# Altium PCB DragonFly.PcbDoc (part 2 of 2)
Units mil, origin at the board's own origin, x right, y up, seen from the top; angles counter-clockwise.
Board outline 2810.81 x 2810.8 mil, 4 copper layers (Top Layer, Mid-Layer 1, Mid-Layer 2, Bottom Layer); 100 components, 58 nets, 317 pads, 146 vias.
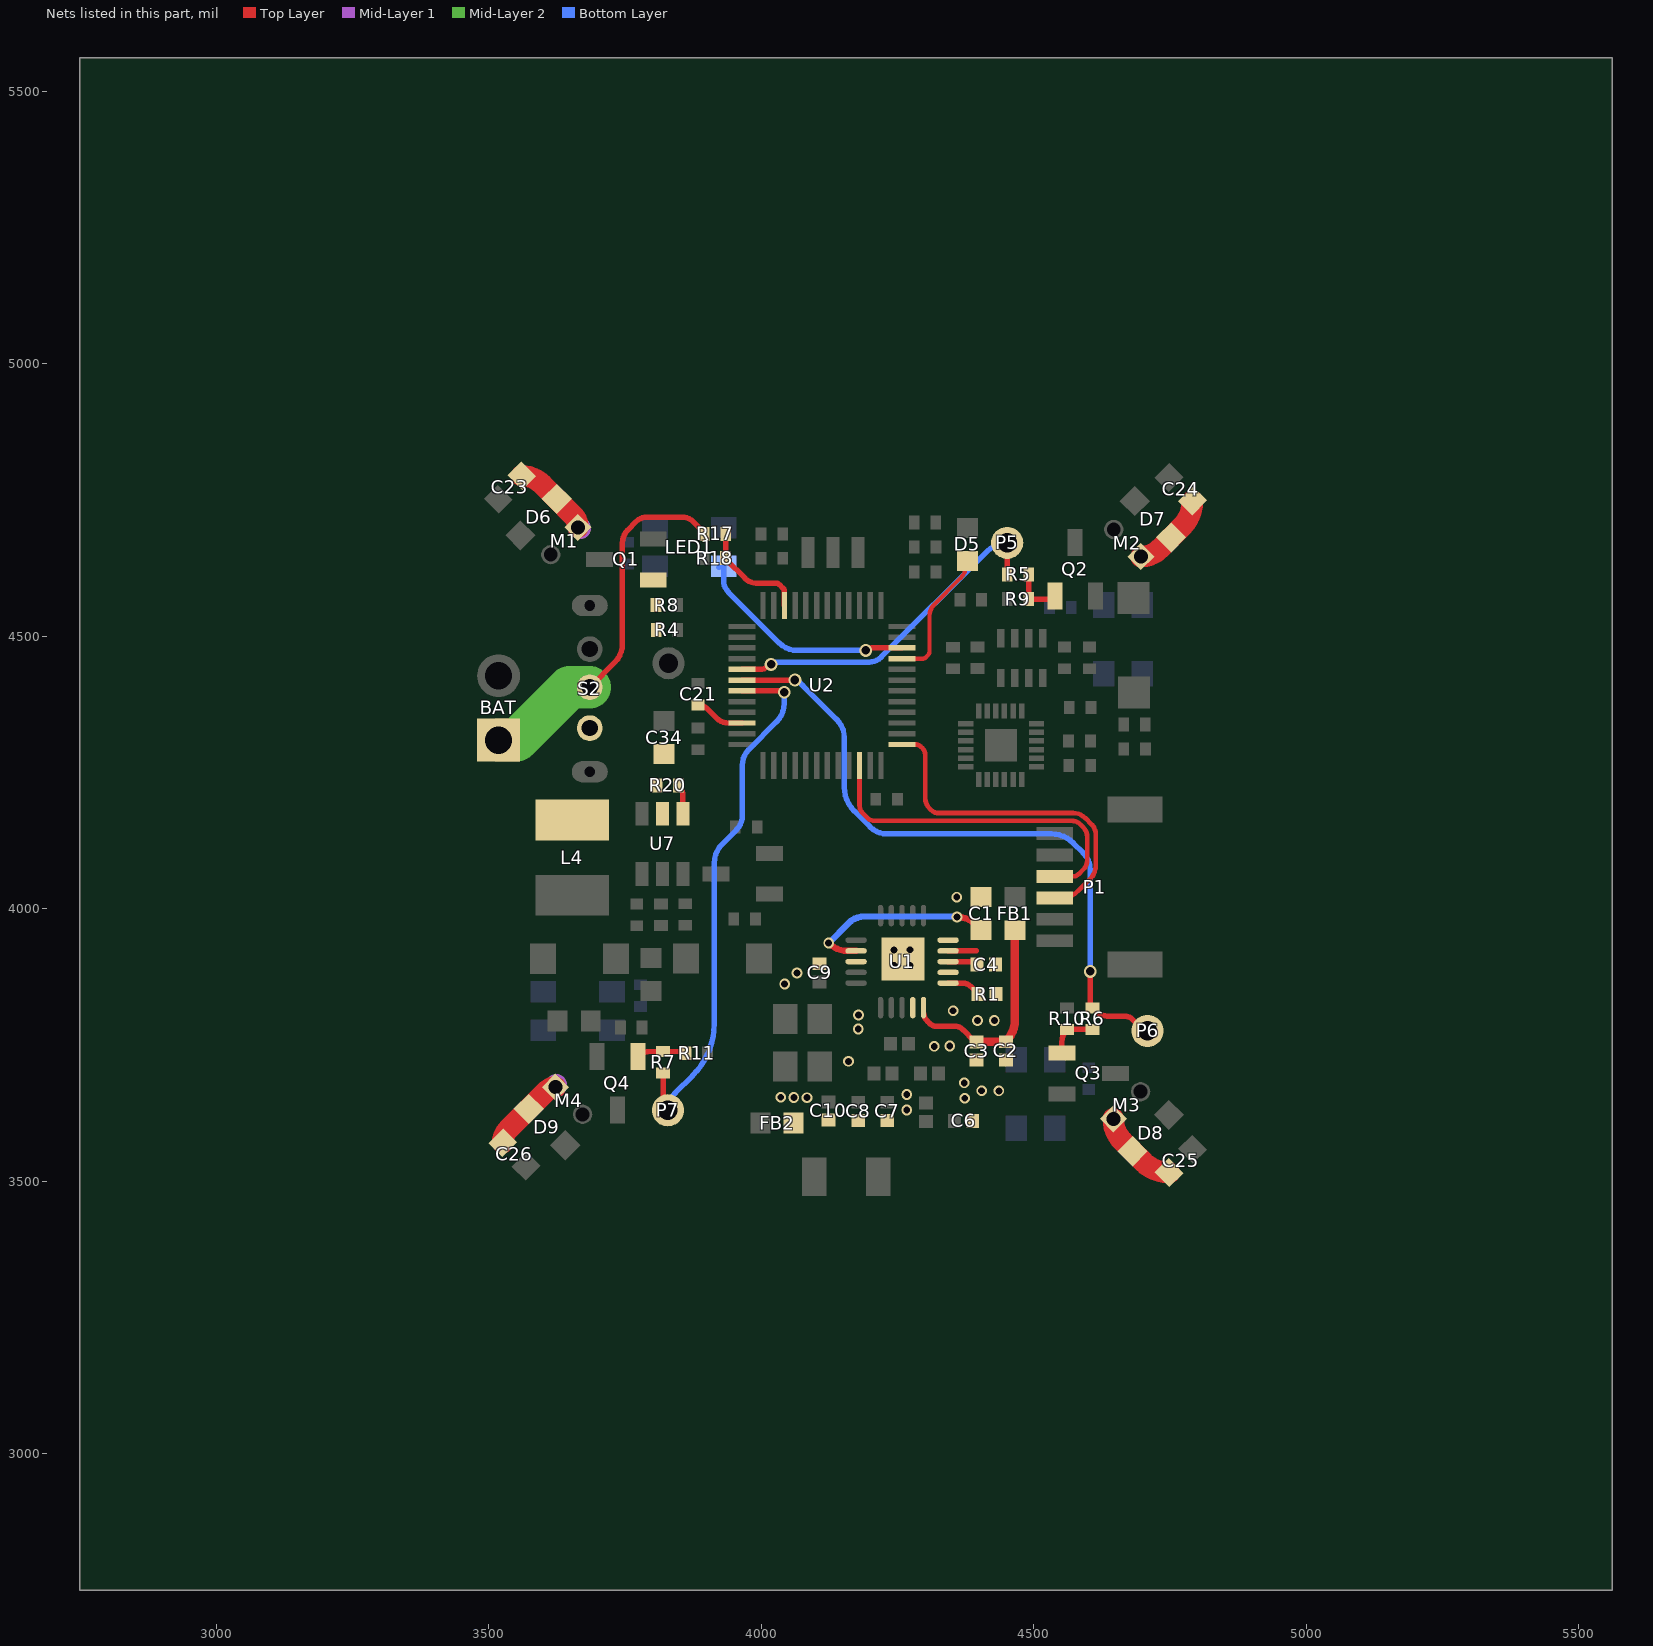
[diagram p4: the nets of this part, all layers, seen from the top]

## Via types
v1: diameter 19.69, hole 12.6, Top Layer to Bottom Layer, 135 vias
v2: diameter 23.62, hole 15.75, Top Layer to Bottom Layer, 11 vias

## Nets (pads, with @x,y where several pads share a name; then routed paths per layer and width w, separated by ;. In a path a pad name is that pad's centre, name@x,y a point inside that pad or via, vN(x,y) a via of type N, cw(c..) or ccw(c..) an arc to the next point about the centre after c; other vN are vias at no path point) (continued)
PWM2: P5.1 R5.1 U2.17 | length 635
  Top Layer w10: U2.17@3964.68,4439.06 3995.68,4439.06 ccw(c3995.71,4470.65) v2(4018.05,4448.31) ; R5.1@4451.08,4614.2 P5.1@4451.08,4671.14 ; R5.1@4451.13,4614.2 ccw(c4452.43,4614.2) R5.1@4451.45,4613.29
  Bottom Layer w10: v2(4018.05,4448.31) cw(c4027.56,4438.81) 4027.56,4452.25 4048.82,4452.25 4187.73,4452.25 4198.16,4452.25 ccw(c4198.16,4483.17) 4220.02,4461.31 4414.81,4656.1 cw(c4451.13,4619.78) P5.1@4451.13,4671.14
PWM3: P6.1 R6.1 U2.18 | length 1236.4
  Top Layer w10: U2.18@3964.73,4419.36 4065.58,4419.38 ccw(c4065.62,4420.04) v2@4066.08,4419.57 ; v2(4603.48,3884.93) 4603.48,3827.52 ccw(c4616.94,3827.52) 4607.42,3818 4614.04,3811.39 ccw(c4634.19,3831.53) 4634.19,3803.04 4665.84,3803.04 cw(c4665.83,3781.53) 4681.04,3796.74 4697.21,3780.58 ccw(c4708.6,3791.97) P6.1@4708.6,3775.88
  Bottom Layer w10: v2(4061.75,4419.57) cw(c4061.75,4409.07) v2@4069.17,4416.5 ; v2@4069.18,4416.5 4075.88,4409.79 4138.38,4347.27 cw(c4104.78,4313.67) 4152.3,4313.67 4152.3,4222.58 ccw(c4212.79,4222.58) 4170.02,4179.81 4200.01,4149.82 ccw(c4230.26,4180.06) 4230.25,4137.29 4532.07,4137.29 cw(c4532.07,4080.83) 4571.99,4120.76 4590.96,4101.79 cw(c4560.71,4071.54) 4603.48,4071.54 v2(4603.48,3884.93)
PWM4: P7.1 R7.1 U2.19 | length 989
  Top Layer w10: R7.1@3819.98,3698.71 3819.98,3651.14 ccw(c3849.61,3651.14) P7.1@3828.68,3630.21 ; U2.19@3964.73,4399.67 4035.88,4399.69 cw(c4035.89,4390.96) v2(4042.06,4397.13)
  Bottom Layer w10: P7.1@3828.68,3630.21 cw(c3873.35,3630.21) 3841.77,3661.8 3874.35,3694.38 ccw(c3779.3,3789.43) 3913.72,3789.43 3913.72,4083.75 cw(c3962.19,4083.75) 3927.92,4118.02 3954.27,4144.38 ccw(c3927.66,4170.99) 3965.29,4170.99 3965.3,4234.93 3965.3,4263.34 cw(c4005.88,4263.34) 3977.18,4292.04 4028.28,4343.19 ccw(c3995.02,4376.46) 4042.07,4376.46 v2(4042.06,4397.13)
Q1_1: Q1.1 R4.2 R8.2
Q2_1: Q2.1 R5.2 R9.2 | length 94.9
  Top Layer w10: R5.2@4490.88,4613.28 4490.88,4568.94 cw(c4489.55,4568.94) 4490.49,4568 4525.18,4568 ccw(c4525.2,4586.85) Q2.1@4538.52,4573.52
Q3_1: Q3.1 R6.2 R10.2 | length 92.2
  Top Layer w10: Q3.1@4551.53,3735.32 4551.48,3755.85 ; 4551.53,3755.85 cw(c4583.76,3755.85) R10.2@4560.97,3778.63 ; R10.2@4560.98,3778.63 R6.2@4607.38,3778.63
Q4_1: Q4.1 R7.2 R11.2 | length 91.8
  Top Layer w10: Q4.1@3773.56,3729.01 cw(c3795.44,3707.14) 3795.44,3738.07 ; 3795.48,3738.07 3819.98,3738.07 R11.2@3854.58,3738.07 ; R11.2@3854.55,3738.07 cw(c3854.55,3727.32) R11.2@3862.15,3734.92
R1_1: R1.1 U1.16 | length 62.8
  Top Layer w10: U1.16@4342.57,3863.55 4369.78,3863.55 ; 4369.83,3863.55 cw(c4369.83,3843.79) 4383.8,3857.76 4396.68,3844.87 cw(c4395.02,3843.2) R1.1@4397.38,3843.2
R20_1: R20.1 U7.4 | length 54.5
  Top Layer w10: R20.1@3848.37,4226.26 cw(c3829.37,4207.26) 3856.24,4207.26 ; U7.4@3856.28,4173.91 3856.28,4207.26
RF-3V3: C1.1 C2.1 C3.1 C4.1 FB1.2 U1.7 U1.15 U1.18 U1.19 | length 860.1
  Top Layer w10: U1.15@4297.57,3818.55 4297.57,3810.55 ccw(c4320.44,3810.55) 4304.27,3794.38 4309.38,3789.27 ccw(c4320.81,3800.69) 4320.81,3784.54 4354.41,3784.54 cw(c4354.42,3763.03) 4369.62,3778.24 4390.38,3757.45 ccw(c4394.89,3761.92) C3.1@4394.88,3755.63 ; U1.18@4342.57,3902.92 4382.78,3902.92 cw(c4382.8,3884.52) C4.1@4395.81,3897.53 ; U1.19@4342.57,3922.6 4394.08,3922.6
  Top Layer w11.81: v1(4123.56,3936.9) ccw(c4158.08,3971.41) 4158.08,3922.6 U1.7@4173.83,3922.6 ; v1(4358.99,3984.93) cw(c4358.99,3937.39) 4392.61,3971.01 C1.1@4403.09,3960.52
  Top Layer w15.75: C3.1@4394.88,3755.63 cw(c4396.05,3754.43) C3.1@4396.05,3756.07 ; C3.1@4396.08,3756.07 C2.1@4448.68,3756.07 ; C2.1@4448.67,3756.07 ccw(c4408.55,3796.2) 4465.29,3796.2 FB1.2@4465.3,3960.51
  Bottom Layer w11.81: v1(4123.56,3936.9) 4160.41,3973.74 cw(c4189.31,3944.84) 4189.31,3985.72 4357.1,3985.72 cw(c4357.1,3983.03) v1(4358.99,3984.93)
RF-GND: C1.2 C2.2 C3.2 C4.2 C6.1 C7.1 C8.1 C9.1 C10.1 FB2.2 pad.9 R1.2 U1.8 U1.14 U1.17 U1.20
  other v1: 4266.87,3630.6 4373.17,3652.25 4083.8,3653.43 4035.76,3654.22 4059.78,3653.83 4266.87,3659.34 4404.27,3666.03 4435.76,3665.93 4372.38,3680.6 4159.78,3719.97 4317.26,3747.53 4345.61,3748.32 4177.89,3779.42 4396.79,3794.77 4427.5,3794.77 4178.28,3805.01 4351.91,3812.88 4042.85,3862.09 4065.69,3882.17 4243.24,3896.34 4272.77,3895.95 4243.24,3924.3 4272.77,3924.69 4358.6,4021.15
RGB: LED1.4 U2.46 | length 414.3
  Top Layer w10: v2(4191.67,4473.9) cw(c4202.6,4462.98) 4202.6,4478.43 U2.46@4258.04,4478.41
  Bottom Layer w10: LED1.4@3922.38,4625.96 cw(c3925.05,4625.96) 3923.16,4627.84 ccw(c3924.1,4626.9) LED1.4@3922.78,4626.9 ; LED1.4@3931.02,4627.85 3930.98,4601.48 ccw(c3959.57,4601.48) 3939.38,4581.3 4033.78,4486.9 ccw(c4065.16,4518.26) 4065.16,4473.9 v2(4191.67,4473.9)
SWCLK: P1.3 U2.37 | length 643.3
  Top Layer w8.66: U2.37@4258.04,4301.25 4283.48,4301.26 ; 4283.44,4301.26 cw(c4283.44,4288.51) 4292.46,4297.53 4295.99,4293.99 cw(c4284.57,4282.57) 4300.73,4282.57 4300.73,4202.6 ccw(c4326.27,4202.6) 4308.21,4184.54 4311.97,4180.77 ccw(c4324.74,4193.54) 4324.74,4175.48 4572.17,4175.48 cw(c4572.17,4144.56) 4594.03,4166.42 4606.64,4153.82 cw(c4590.51,4137.68) 4613.32,4137.68 4613.32,4093.08 4613.32,4078.21 cw(c4581.06,4078.21) 4603.88,4055.4 4580.25,4031.78 cw(c4551.75,4060.28) 4551.75,4019.97 P1.3@4538.52,4019.97
SWDIO: P1.4 U2.34 | length 642.8
  Top Layer w8.66: 4180.26,4188.79 ccw(c4199.07,4188.78) 4185.77,4175.48 4194.65,4166.6 ccw(c4207.42,4179.36) 4207.42,4161.31 4569.21,4161.31 cw(c4569.21,4138.46) 4585.37,4154.61 4590.73,4149.25 cw(c4573.26,4131.78) 4597.97,4131.78 4597.97,4104.24 4597.97,4089.05 cw(c4573.77,4089.05) 4590.88,4071.94 4582.46,4063.51 cw(c4572.38,4073.59) 4572.38,4059.34 P1.4@4538.58,4059.34 ; 4180.28,4188.78 U2.34@4180.28,4262.86 ; P1.4@4538.52,4059.34 P1.4@4540.28,4059.34
U2_22: C21.2 U2.22 | length 91.8
  Top Layer w10: C21.2@3884.17,4373.59 cw(c3884.19,4349.99) 3900.88,4366.67 3917.66,4349.89 ccw(c3939.98,4372.22) 3939.98,4340.64 U2.22@3964.73,4340.62
USER-LED: D5.2 U2.45 | length 249.2
  Top Layer w7.87: U2.45@4257.98,4458.75 4296.88,4458.75 ; 4296.85,4458.75 ccw(c4296.85,4464.78) 4301.12,4460.52 4305.82,4465.21 ccw(c4299.09,4471.94) 4308.6,4471.94 4308.6,4537.24 cw(c4338.18,4537.24) 4317.26,4558.16 4364.7,4605.6 ccw(c4332.43,4637.87) D5.2@4378.07,4637.87
VBAT: BAT.1 R17.1 S2.2 | length 683
  Top Layer w10: S2.2@3685.37,4406.19 3731.58,4452.4 ccw(c3698.65,4485.32) 3745.22,4485.32 3745.22,4671.01 cw(c3778.82,4671.01) 3755.06,4694.77 3770.61,4710.32 cw(c3790.1,4690.83) 3790.1,4718.39 3854.06,4718.39 cw(c3854.06,4687.48) 3875.92,4709.34 3894.18,4691.06 cw(c3890.83,4687.68) R17.1@3895.55,4687.69
  Mid-Layer 2 w78.74: BAT.1@3518.05,4309.18 3551.38,4309.18 3648.38,4406.19 S2.2@3685.37,4406.19
VBAT-OUT: C23.2 C24.2 C25.2 C26.2 C34.1 D6.1 D7.1 D8.1 D9.1 L4.1 M1.1 M2.1 M3.1 M4.1 R20.2 S2.3 U7.5 | length 601.4
  Top Layer w39.37: C26.2@3525.65,3570.61 cw(c3560.34,3570.61) 3535.81,3595.14 D9.1@3573.45,3632.78 M4.1@3607.48,3666.77 ; C23.2@3560.42,4794.14 cw(c3560.39,4741.1) 3597.88,4778.59 D6.1@3624.87,4751.61 3654.38,4722.05 cw(c3631.87,4699.5) M1.1@3663.76,4699.5 ; M4.1@3607.45,3666.78 cw(c3622.21,3652.01) M4.1@3622.22,3672.89 ; M3.1@4645.83,3614.29 ccw(c4703.68,3614.29) 4662.77,3573.39 ; 4662.78,3573.39 D8.1@4681.1,3555.06 4700.58,3535.56 ccw(c4748.19,3583.16) C25.2@4748.19,3515.85 ; M2.1@4696.56,4645.78 ccw(c4696.56,4694.11) 4730.74,4659.94 ; 4730.78,4659.94 D7.1@4751.85,4681.05 4771.38,4700.55 ; 4771.35,4700.55 ccw(c4723.76,4748.14) C24.2@4791.06,4748.14
  Mid-Layer 1 w39.37: M4.1@3622.22,3672.89 ccw(c3618,3677.1) M4.1@3623.96,3677.1 ; M1.1@3663.76,4699.5 cw(c3663.76,4692.97) M1.1@3668.38,4697.59
VBAT-TST: R17.2 R18.1 U2.10 | length 204.4
  Top Layer w10: R17.2@3934.98,4687.69 3934.98,4644.14 cw(c3933.64,4644.14) 3934.59,4643.19 ccw(c3938.38,4643.19) 3935.7,4640.51 3970.78,4605.4 ccw(c3990.77,4625.36) 3990.77,4597.13 4026.75,4597.13 cw(c4026.75,4587.72) 4033.4,4594.38 4040.19,4587.59 cw(c4034.74,4582.13) 4042.45,4582.13 ; U2.10@4042.48,4556.17 4042.48,4582.13
pads on no net: E1.0 LED4.2 P1.7 P1.8 S2.1 S2.4 S2.5 U2.2 U2.3 U2.4 U2.11 U2.12 U2.13 U2.14 U2.15 U2.21 U2.32 U2.33 U2.38 U2.39 U2.41 U7.6 U9.2 U9.3 U9.4 U9.5 U9.6 U9.7 U9.14 U9.15 U9.16 U9.17 U9.19 U9.21 XTAL.2 XTAL.4

## Polygon pours and split planes (outlines as drawn)
RF-GND on Top Layer "Top Layer-RF-GND" (solid, remove dead copper, pour order 0): 4035.77,3575.09 4035.77,3614.85 ccw(c3996.79,3614.85) 4024.35,3642.41 4012.32,3654.43 cw(c4036.52,3678.63) 4002.3,3678.63 4002.3,3838.49 cw(c4018.43,3838.49) 4007.03,3849.89 4147.97,3990.83 cw(c4186.95,3951.85) 4186.95,4006.98 4255.81,4006.98 ccw(c4255.81,4052.68) 4288.13,4020.36 4319.18,4051.41 cw(c4332.62,4037.97) 4332.62,4056.98 4415.07,4056.98 cw(c4415.07,4042.19) 4425.53,4052.64 4449.46,4028.71 cw(c4429.3,4008.55) 4457.81,4008.55 ccw(c4477.77,4008.55) 4463.66,3994.44 4464.11,3993.98 4471.01,3987.09 cw(c4462.94,3979.02) 4474.35,3979.02 4474.35,3696.31 cw(c4425.96,3696.31) 4460.18,3662.09 4421.25,3623.17 ccw(c4462.25,3582.17) 4404.27,3582.17 cw(c4369.33,3581.53) 4403.88,3576.27 cw(c4385.83,3595.82) 4400.33,3573.51 4325.53,3573.12
GND on Top Layer "Top Layer-GND" (solid, remove dead copper, pour order 4): 3408.8,4749.49 ccw(c3408.8,4751.39) 3410.14,4750.05 3551.71,4891.61 cw(c3565.02,4878.31) 3565.02,4897.13 3608.8,4897.13 4736.77,4897.13 cw(c4736.77,4864.86) 4759.59,4887.68 4874.46,4772.81 cw(c4842.87,4741.22) 4887.54,4741.22 4887.54,3579.62 cw(c4840.49,3579.62) 4873.76,3546.35 4764.82,3437.41 cw(c4737.93,3464.29) 4737.94,3426.27 3610.13,3426.27 cw(c3610.13,3498.86) 3558.8,3447.53 3448.91,3557.42 cw(c3485.88,3594.38) 3433.61,3594.39 3433.61,4692.58 ccw(c3418.82,4692.58) 3429.28,4703.03 3419.83,4712.48 cw(c3447.38,4740.05) 3408.41,4740.04
RF-GND on Bottom Layer "Bottom Layer-RF-GND" (solid, remove dead copper, pour order 1): 4034.59,3532.57 4034.59,3613.66 ccw(c3995.61,3613.66) 4023.17,3641.23 4011.15,3653.25 cw(c4035.34,3677.44) 4001.13,3677.45 4001.13,3837.3 cw(c4017.26,3837.3) 4005.85,3848.71 4146.79,3989.64 cw(c4185.77,3950.66) 4185.77,4005.78 4254.63,4005.78 ccw(c4254.64,4051.49) 4286.95,4019.17 4318,4050.22 cw(c4331.44,4036.78) 4331.44,4055.78 4413.9,4055.78 cw(c4413.9,4041) 4424.35,4051.45 4448.28,4027.52 cw(c4428.12,4007.36) 4456.64,4007.36 ccw(c4476.6,4007.36) 4462.48,3993.25 4462.93,3992.8 4469.83,3985.9 cw(c4461.76,3977.83) 4473.17,3977.84 4473.17,3695.12 cw(c4424.78,3695.12) 4459,3660.91 4420.07,3621.98 ccw(c4461.07,3580.99) 4403.09,3580.99 4403.09,3569.48 cw(c4368.15,3569.48) 4392.86,3544.76 4387.66,3539.57 cw(c4368.85,3558.39) 4368.84,3531.78
GND on Bottom Layer "Bottom Layer-GND" (solid, remove dead copper, pour order 6): 3408.6,4749.49 ccw(c3408.61,4751.4) 3409.95,4750.05 3551.52,4891.62 cw(c3564.83,4878.31) 3564.82,4897.13 3608.6,4897.13 4736.58,4897.13 cw(c4736.58,4864.87) 4759.39,4887.68 4874.26,4772.81 cw(c4842.67,4741.22) 4887.34,4741.23 4887.34,3579.61 cw(c4840.3,3579.62) 4873.56,3546.35 4764.62,3437.41 cw(c4737.74,3464.29) 4737.73,3426.28 3609.93,3426.28 cw(c3609.93,3498.86) 3558.6,3447.53 3448.72,3557.42 cw(c3485.68,3594.38) 3433.41,3594.38 3433.41,4692.58 ccw(c3418.62,4692.58) 3429.08,4703.04 3419.62,4712.49 cw(c3447.18,4740.04) 3408.21,4740.05
3V3-1 on Mid-Layer 2 "Mid-Layer 2-3V3-1" (solid, remove dead copper, pour order 2): 3780.65,3771.54 3822.38,3771.54 3828.29,3777.45 3828.29,3869.97 3833.8,3875.48 3872.78,3875.48 3877.89,3875.48 4033.8,4031.39 4303.88,4031.39 4344.82,4072.33 4382.22,4109.73 4536.55,4109.73 4549.15,4122.33 4549.15,4677.84 4541.67,4682.96 3823.56,4684.14 3801.12,4660.91 3801.12,3970.76 3766.87,3936.5 3766.87,3776.27 3771.2,3771.94
VBAT-OUT on Mid-Layer 2 "Mid-Layer 2-VBAT-OUT" (solid, remove dead copper, pour order 3): 3408.8,4749.49 ccw(c3408.8,4751.39) 3410.14,4750.05 3551.71,4891.61 cw(c3565.02,4878.31) 3565.02,4897.13 3608.8,4897.13 4736.77,4897.13 cw(c4736.77,4864.87) 4759.59,4887.68 4874.45,4772.81 cw(c4842.86,4741.22) 4887.54,4741.22 4887.54,3579.62 cw(c4840.49,3579.62) 4873.76,3546.35 4764.82,3437.41 cw(c4737.93,3464.29) 4737.93,3426.27 3610.13,3426.27 cw(c3610.13,3498.86) 3558.8,3447.53 3448.91,3557.42 cw(c3485.88,3594.38) 3433.6,3594.38 3433.6,4692.58 ccw(c3418.82,4692.58) 3429.27,4703.03 3419.82,4712.48 cw(c3447.38,4740.04) 3408.41,4740.04
GND on Mid-Layer 1 "Mid-Layer 1-GND" (solid, remove dead copper, pour order 5): 3408.8,4749.49 ccw(c3408.8,4751.4) 3410.14,4750.05 3551.71,4891.62 cw(c3565.02,4878.31) 3565.02,4897.13 3608.8,4897.13 4736.78,4897.13 cw(c4736.77,4864.87) 4759.59,4887.68 4874.45,4772.81 cw(c4842.86,4741.22) 4887.54,4741.23 4887.54,3579.61 cw(c4840.49,3579.61) 4873.76,3546.35 4764.81,3437.41 cw(c4737.93,3464.29) 4737.93,3426.27 3610.13,3426.27 cw(c3610.13,3498.86) 3558.8,3447.53 3448.91,3557.42 cw(c3485.88,3594.38) 3433.61,3594.38 3433.61,4692.58 ccw(c3418.82,4692.59) 3429.28,4703.04 3419.82,4712.49 cw(c3447.38,4740.04) 3408.41,4740.05

## Keep-outs
Top Layer:
  region: 4426.12,4408.35 4426.12,4386.31 4487.54,4386.31 4487.63,4386.4 4487.78,4386.62 4487.88,4386.86 4487.93,4387.12 4487.93,4387.26 4487.93,4401.66 4487.93,4402.6 4487.57,4404.43 4486.85,4406.16 4485.81,4407.72 4485.15,4408.38 4484.78,4408.75
  region: 4356.64,4349.49 4378.69,4349.49 4378.69,4410.91 4378.59,4411.01 4378.37,4411.15 4378.13,4411.25 4377.87,4411.3 4377.74,4411.3 4363.33,4411.3 4362.39,4411.3 4360.56,4410.94 4358.83,4410.22 4357.27,4409.18 4356.61,4408.52 4356.25,4408.16
Mid-Layer 1:
  region: 3982.81,3553.83 3982.81,3564.06 3990.29,3571.54 3997.78,3571.54 4126.12,3571.54 4293.84,3571.54 4314.7,3550.68 4314.7,3525.48 4314.7,3471.15 4275.73,3432.17 4000.53,3432.17 3982.81,3449.89 3982.81,3549.5
Mid-Layer 2:
  region: 4001.12,3574.69 4310.96,3574.69 4326.71,3558.95 4326.71,3464.85 4296.4,3434.54 4007.03,3434.54 3992.07,3449.5 3992.07,3565.64 4000.73,3574.3
Bottom Layer:
  region: 3893.64,4411.7 3947.58,4411.7 3965.3,4429.42 3965.3,4527.45 3971.59,4533.75 3977.5,4533.75 3981.04,4530.2 3981.04,4413.27 3972.78,4405.01 3893.64,4405.01 3892.46,4406.19 3892.46,4410.91

## Other copper
Top Layer:
  region net Q1_1: 3796.79,4498.31 3817.66,4498.31 3817.66,4570.75 3796.79,4570.75
  region net 3V3-1: 4491.28,4271.15 4504.27,4271.15 4504.27,4297.13 4491.28,4297.13
  region net RF-3V3: 4383.01,3941.62 4485.37,3941.62 4485.37,3979.81 4383.01,3979.81
  region net RF-3V3: 4383.01,3884.53 4408.21,3884.53 4408.21,3979.81 4383.01,3979.81
  region net 5V: 3838.13,3822.33 3885.77,3822.33 3885.77,3936.11 3838.13,3936.11
  region net 3V3-1: 4271.2,4512.88 4284.59,4512.88 4284.59,4533.35 4271.2,4533.35
  region net 3V3-1: 3908.99,4173.12 3955.05,4173.12 3955.05,4239.26 3908.99,4239.26
  region net 3V3-1: 4225.92,4660.12 4290.49,4660.12 4290.49,4686.89 4225.92,4686.89
  region net 3V3-1: 4338.91,4469.96 4409.78,4469.96 4409.78,4490.04 4338.91,4490.04
  region net 3V3-1: 4338.91,4470.36 4380.25,4470.36 4380.25,4521.54 4338.91,4521.54
  region net 3V3-1: 4238.91,4188.87 4284.19,4188.87 4284.19,4213.67 4238.91,4213.67
  region net 3V3-1: 4264.11,4188.86 4284.19,4188.86 4284.19,4249.1 4264.11,4249.1
  region net 3V3-1: 3988.91,4630.99 4009.78,4630.99 4009.78,4700.28 3988.91,4700.28
  region net 3V3-1: 3958.99,4675.47 4009.78,4675.47 4009.78,4700.67 3958.99,4700.67
  region net C7_2: 4194.03,3710.91 4194.03,3687.55 4194.01,3687.02 4193.8,3685.99 4193.4,3685.02 4192.81,3684.14 4192.46,3683.75 4166.25,3657.53 4166.11,3657.41 4165.8,3657.2 4165.45,3657.06 4165.09,3656.99 4164.9,3656.98 4164.9,3632.57 4245.22,3632.57 4245.22,3657.37 4219.39,3683.19 4219.27,3683.33 4219.06,3683.64 4218.92,3683.98 4218.85,3684.35 4218.84,3684.54 4218.84,3710.91
  region net VBAT-OUT: 186 vertices and 0 holes, not listed, extent 3583.41,4123.12 3843.25,4362.49
  region net I2C1-SCL: 4233.01,4394.38 4317.26,4394.38 4318.44,4394.17 4320.71,4393.46 4322.81,4392.35 4324.69,4390.89 4325.53,4390.05 4327.1,4387.68 4327.37,4387.41 4328.01,4387.02 4328.74,4386.82 4329.49,4386.8 4329.86,4386.9 4332.62,4386.9 4332.91,4386.93 4333.48,4387.11 4333.99,4387.42 4334.42,4387.83 4334.59,4388.08 4336.55,4392.01 4336.99,4392.55 4338.03,4393.43 4339.26,4394.05 4340.59,4394.35 4341.28,4394.38 4361.53,4394.38 4362.99,4394.38 4365.84,4394.95 4368.54,4396.06 4370.96,4397.68 4371.99,4398.71 4400.53,4427.26 4401.36,4428.01 4403.22,4429.25 4405.29,4430.11 4407.48,4430.54 4408.6,4430.6 4421.5,4430.6 4421.89,4430.58 4422.67,4430.42 4423.4,4430.12 4424.06,4429.68 4424.35,4429.42 4430.44,4423.33 4430.75,4422.98 4431.27,4422.21 4431.62,4421.35 4431.81,4420.43 4431.83,4419.97 4431.83,4406.19 4446.4,4406.19 4446.4,4440.83 4433.8,4440.83 4433.05,4440.87 4431.59,4441.16 4430.21,4441.73 4428.97,4442.56 4428.42,4443.06 4427.89,4443.59 4423.19,4448.29 4422.53,4448.95 4420.98,4449.99 4419.25,4450.7 4417.41,4451.07 4416.47,4451.07 4416.48,4451.07 4383.4,4451.07 4383.4,4432.17 4383.38,4431.71 4383.2,4430.79 4382.84,4429.93 4382.33,4429.16 4382.01,4428.81 4379.47,4426.27 4369.6,4416.4 4369.12,4415.97 4368.04,4415.24 4366.83,4414.74 4365.55,4414.49 4364.9,4414.46 4341.1,4414.46 4339.65,4414.46 4336.79,4413.89 4334.1,4412.77 4331.68,4411.15 4330.65,4410.12 4329.38,4408.97 4326.53,4407.07 4323.37,4405.76 4320.01,4405.09 4318.29,4405.01 4288.13,4405.01 4233.01,4405.01
  region net I2C1-SDA: 4233.01,4413.67 4305.08,4413.67 4308.26,4413.67 4314.49,4414.91 4320.36,4417.34 4325.65,4420.87 4327.89,4423.12 4331.69,4426.91 4332.31,4427.47 4333.7,4428.41 4335.25,4429.05 4336.9,4429.37 4337.73,4429.42 4365.69,4429.42 4365.69,4450.68 4330.24,4450.68 4328.65,4450.68 4325.54,4450.06 4322.6,4448.84 4319.96,4447.08 4318.84,4445.95 4302.03,4429.15 4300.93,4428.14 4298.45,4426.49 4295.69,4425.35 4292.77,4424.77 4291.28,4424.69 4233.01,4424.69
  region net Q1_1: 3796.79,4570.75 3779.12,4588.42 3778.91,4588.61 3778.45,4588.92 3777.93,4589.14 3777.39,4589.24 3777.11,4589.26 3777.1,4589.26 3777.11,4589.26 3776.32,4590.05 3776.32,4617.6 3826.71,4617.6 3826.71,4589.26 3825.93,4588.47 3821.28,4583.82 3820.46,4582.92 3819.12,4580.91 3818.19,4578.67 3817.72,4576.3 3817.66,4575.09 3817.66,4570.36 3796.79,4570.36
  region net D10_1: 3623.17,3877.45 3623.17,3951.72 3623.33,3955.01 3624.62,3961.47 3627.14,3967.56 3630.8,3973.04 3633.01,3975.48 3639.74,3982.21 3640.71,3983.09 3642.88,3984.54 3645.29,3985.54 3647.85,3986.05 3649.15,3986.11 3716.91,3986.11 3717.84,3986.11 3719.65,3986.47 3721.37,3987.18 3722.91,3988.21 3723.56,3988.87 3723.75,3989.05 3724.04,3989.49 3724.25,3989.98 3724.35,3990.5 3724.35,3990.77 3724.35,4008.16 3724.35,4017.29 3724.44,4019.14 3725.16,4022.76 3726.57,4026.16 3728.62,4029.23 3729.86,4030.6 3736.32,4037.05 3737.35,4037.99 3739.68,4039.54 3742.26,4040.61 3745,4041.16 3746.4,4041.23 3794.03,4041.23 3794.03,4085.72 3741.53,4085.72 3739.41,4085.72 3735.25,4084.89 3731.34,4083.27 3727.82,4080.91 3726.32,4079.42 3714.07,4067.17 3713.11,4066.3 3710.94,4064.85 3708.53,4063.85 3705.97,4063.34 3704.67,4063.28 3584.98,4063.28 3584.98,4010.91 3584.98,3984.2 3584.92,3982.88 3584.4,3980.3 3583.39,3977.86 3581.93,3975.67 3581.04,3974.69 3579.73,3973.38 3577.67,3970.3 3576.26,3966.88 3575.53,3963.24 3575.53,3961.39 3575.53,3932.57 3575.53,3877.45
  region net C32_2: 3759,3998.32 3872.45,3998.32 3872.71,3998.31 3873.23,3998.42 3873.72,3998.62 3874.16,3998.91 3874.35,3999.1 3874.54,3999.29 3874.83,3999.73 3875.03,4000.22 3875.14,4000.74 3875.14,4001 3875.14,4001.07 3875.14,4027 3875.14,4028.32 3874.62,4030.92 3873.61,4033.37 3872.14,4035.57 3871.2,4036.5 3870.67,4037.09 3869.79,4038.41 3869.19,4039.87 3868.88,4041.42 3868.84,4042.21 3868.84,4043.2 3868.84,4085.72 3843.64,4085.72 3843.64,4044.18 3843.6,4043.39 3843.29,4041.83 3842.69,4040.37 3841.81,4039.06 3841.28,4038.47 3837.44,4034.63 3837.04,4034.23 3836.42,4033.3 3835.99,4032.26 3835.77,4031.16 3835.77,4030.6 3835.77,4025.34 3835.74,4024.82 3835.54,4023.78 3835.13,4022.81 3834.55,4021.93 3834.19,4021.54 3832.95,4020.3 3832.67,4020.04 3832.05,4019.63 3831.36,4019.34 3830.63,4019.2 3830.26,4019.18 3759,4019.18
  region net 5V: 3709,3879.42 3758.08,3879.42 3759.14,3879.42 3761.22,3879.83 3763.18,3880.64 3764.94,3881.82 3765.69,3882.57 3771.45,3888.33 3772.07,3888.89 3773.47,3889.82 3775.02,3890.47 3776.66,3890.79 3777.5,3890.83 3777.5,3890.84 3816.97,3890.83 3818.16,3890.78 3820.49,3890.31 3822.68,3889.41 3824.65,3888.09 3825.53,3887.29 3830.5,3882.32 3831.1,3881.72 3832.5,3880.78 3834.06,3880.14 3835.71,3879.81 3836.55,3879.81 3884.65,3879.81 3884.92,3879.81 3885.44,3879.91 3885.93,3880.12 3886.37,3880.41 3886.55,3880.6 3886.65,3880.69 3886.8,3880.91 3886.9,3881.16 3886.95,3881.42 3886.95,3881.55 3886.95,3882.57 3886.95,3934.83 3886.95,3935.23 3886.79,3936.01 3886.49,3936.74 3886.05,3937.4 3885.77,3937.68 3882.22,3937.68 3840.12,3937.68 3839.47,3937.72 3838.17,3937.97 3836.96,3938.48 3835.86,3939.21 3835.37,3939.65 3831.81,3943.22 3831.37,3943.7 3830.65,3944.78 3830.15,3945.99 3829.89,3947.27 3829.86,3947.92 3829.86,3978.47 3829.86,3978.6 3829.81,3978.86 3829.71,3979.1 3829.56,3979.32 3829.47,3979.42 3759,3979.42 3759,3950.15 3758.97,3949.62 3758.76,3948.59 3758.36,3947.61 3757.78,3946.74 3757.42,3946.35 3751.66,3940.59 3751.04,3940.02 3749.64,3939.09 3748.09,3938.45 3746.45,3938.12 3745.61,3938.08 3709,3938.08 3709,3905.8
  region net D11_2: 4020.02,3880.6 4020.02,3936.5 4020.02,3936.78 4019.91,3937.34 4019.69,3937.85 4019.38,3938.32 4019.18,3938.52 4013.33,3944.38 4013.05,3944.66 4012.38,3945.1 4011.65,3945.4 4010.87,3945.56 4010.47,3945.56 4003.88,3945.56 3985.34,3945.56 3984.41,3945.6 3982.6,3945.96 3980.9,3946.67 3979.37,3947.69 3978.68,3948.31 3978.68,3948.32 3962.8,3964.2 3962.3,3964.75 3961.47,3965.99 3960.9,3967.37 3960.61,3968.83 3960.57,3969.57 3960.57,3991.43 3960.57,3992.22 3960.26,3993.78 3959.65,3995.25 3958.77,3996.57 3958.21,3997.13 3945.41,4009.93 3944.66,4010.76 3943.41,4012.62 3942.56,4014.69 3942.12,4016.88 3942.07,4018 3942.07,4078.63 3891.28,4078.63 3891.28,4035.38 3891.28,4034.06 3891.8,4031.46 3892.81,4029.01 3894.28,4026.81 3895.22,4025.87 3934.79,3986.3 3935.54,3985.47 3936.78,3983.61 3937.64,3981.55 3938.07,3979.35 3938.13,3978.24 3938.13,3964.32 3938.13,3963.79 3938.34,3962.75 3938.74,3961.77 3939.33,3960.89 3939.7,3960.52 3968.42,3931.81 3969.04,3931.12 3970.08,3929.57 3970.79,3927.85 3971.15,3926.02 3971.2,3925.09 3971.2,3880.6
  region net 3V3-1: 4040.49,4086.9 3989.87,4086.9 3989.74,4086.9 3989.48,4086.95 3989.23,4087.05 3989.01,4087.2 3988.92,4087.29 3988.82,4087.38 3988.68,4087.6 3988.57,4087.85 3988.52,4088.11 3988.52,4088.24 3988.52,4114.85 3988.44,4116.62 3987.75,4120.09 3986.39,4123.36 3984.42,4126.31 3983.23,4127.62 3983.01,4127.84 3982.45,4128.4 3981.57,4129.72 3980.96,4131.19 3980.65,4132.75 3980.65,4133.54 3980.65,4135.32 3980.65,4161.84 3980.62,4162.36 3980.42,4163.4 3980.01,4164.37 3979.43,4165.25 3979.07,4165.64 3973.26,4171.45 3972.85,4171.82 3971.92,4172.45 3970.89,4172.87 3969.79,4173.09 3969.23,4173.12 3933.59,4173.12 3932.8,4173.12 3931.24,4173.43 3929.78,4174.04 3928.45,4174.92 3927.89,4175.48 3925.63,4177.75 3925.23,4178.14 3924.6,4179.08 3924.18,4180.12 3923.96,4181.22 3923.96,4181.78 3923.96,4215.68 3923.96,4216.6 3924.32,4218.42 3925.03,4220.13 3926.06,4221.67 3926.71,4222.33 3944.68,4240.3 3945.27,4240.89 3946.68,4241.83 3948.23,4242.47 3949.89,4242.8 3950.73,4242.8 3968.58,4242.8 3969.11,4242.8 3970.15,4242.6 3971.13,4242.19 3972.01,4241.6 3972.38,4241.23 3975.83,4237.78 3976.23,4237.38 3976.85,4236.45 3977.28,4235.41 3977.5,4234.31 3977.5,4233.75 3977.5,4208.51 3977.55,4207.59 3977.91,4205.78 3978.61,4204.08 3979.64,4202.54 3980.26,4201.86 4002,4180.12 4002.72,4179.39 4003.87,4177.68 4004.66,4175.77 4005.06,4173.75 4005.06,4172.72 4005.06,4142.11 4005.08,4141.71 4005.23,4140.94 4005.54,4140.21 4005.97,4139.55 4006.24,4139.26 4026.96,4118.54 4027.58,4117.97 4028.98,4117.04 4030.53,4116.4 4032.17,4116.07 4033.01,4116.03 4040.49,4116.03
  region net 3V3-1: 4508.6,4479.42 4531.44,4479.42 4531.99,4479.39 4533.09,4479.17 4534.12,4478.74 4535.05,4478.12 4535.47,4477.75 4542.46,4470.75 4542.93,4470.29 4544.03,4469.55 4545.25,4469.04 4546.55,4468.79 4547.21,4468.79 4547.97,4468.79 4614.51,4468.79 4614.51,4492.01 4555.51,4492.01 4554.19,4492.08 4551.6,4492.59 4549.17,4493.6 4546.98,4495.07 4546,4495.95 4529.28,4512.67 4528.95,4513 4528.17,4513.52 4527.31,4513.88 4526.39,4514.06 4525.92,4514.06 4508.6,4514.06
  region net 3V3-1: 4445.61,4001.86 4463.72,4001.86 4465.13,4001.73 4467.89,4001.09 4470.5,3999.99 4472.88,3998.45 4473.95,3997.53 4490.49,3981.78 4501.91,3969.97 4502.3,3969.59 4503.22,3969 4504.23,3968.6 4505.3,3968.39 4505.85,3968.39 4572.77,3968.39 4572.77,3992.8 4520.41,3992.8 4519.1,3992.87 4516.53,3993.39 4514.11,3994.4 4511.94,3995.86 4510.96,3996.74 4488.13,4018.79 4487.42,4019.55 4486.25,4021.27 4485.44,4023.19 4485.03,4025.23 4484.98,4026.27 4484.98,4040.05 4445.61,4040.05
Mid-Layer 2:
  region net 5V: 3838.52,3822.92 3884.98,3822.92 3884.98,3868.2 3838.52,3868.2
Bottom Layer:
  region net 5V: 3838.13,3823.12 3885.37,3823.12 3885.37,3865.64 3838.13,3865.64

## Silkscreen, mask and mechanical layers (free items; w line width, h text height)
Mechanical 1:
  lines w7.87: 3389.76,3473.46 3000,3083.7 ; 3389.79,4837.52 3000.11,5227.3 ; 3389.84,3473.63 ccw(c2973.7,3893.77) 3564.89,3880.2 3564.9,4104.37 ccw(c3502.54,4104.37) 3546.64,4148.47 3456.24,4238.86 cw(c3472.4,4255.02) 3449.55,4255.02 3449.55,4491.23 cw(c3476.16,4491.23) 3457.34,4510.05 3467.66,4520.36 cw(c3485.72,4502.3) 3485.72,4527.84 3508.6,4527.84 ccw(c3508.6,4551.6) 3525.4,4534.8 3539.28,4548.68 ccw(c3524.52,4564.12) 3544.8,4570.78 ccw(c2973.7,4417.35) 3389.85,4837.49 ; 3473.27,3389.78 3083.5,3000.1 ; 3473.28,3389.8 cw(c3893.42,2973.65) 3879.86,3564.85 cw(c3879.89,3564.82) 3879.89,3564.86 4004.67,3564.86 cw(c4006.5,3539.96) 4031.4,3538.09 4031,3488.1 ccw(c4081.33,3495.71) 4085.7,3445 4229.8,3445 ; 3880.05,4745.99 cw(c3893.61,5337.19) 3473.47,4921.04 ; 4229.82,3444.96 ccw(c4231.18,3490.92) 4277.11,3493.3 4277.1,3536.9 cw(c4306.48,3535.47) 4307.74,3564.86 4430.7,3564.86 ; 4745.99,4430.76 cw(c5337.19,4417.19) 4921.04,4837.33 5310.81,5227.1 ; 4746,4430.99 4746,4155.4 4745.99,3879.85 ccw(c5337.19,3893.41) 4921.04,3473.27 ; 4837.3,3389.8 ccw(c4417.16,2973.65) 4430.72,3564.85 ; 4837.35,3389.75 5227.1,3000 ; 4837.53,4921.02 5227.31,5310.7 ; 4921.03,3473.28 5310.7,3083.5 ; 3000.02,3083.68 3041.8,3041.9 3083.5,3000.08 ; 3000.02,3083.68 3083.5,3000.08 ; 3000.09,5227.3 3041.91,5269 3083.69,5310.78 ; 3000.09,5227.3 3083.69,5310.78 ; 3083.71,5310.8 3473.46,4921.05 ; 3473.46,4921.05 3473.47,4921.04 ; 4430.72,3564.85 ccw(c4430.7,3564.83) 4430.7,3564.86 ; 5227.12,3000.02 5268.9,3041.8 5310.73,3083.49 ; 5227.12,3000.02 5310.73,3083.49 ; 5227.31,5310.72 5269.01,5268.9 5310.79,5227.12 ; 5227.31,5310.72 5310.79,5227.12 ; 3879.86,4745.95 4155.45,4745.95 4431.04,4745.95 3879.86,4745.95 ; 4430.91,4745.95 ccw(c4417.35,5337.15) 4837.49,4921 cw(c4417.35,5337.15) 4430.91,4745.95